# Altium PCB Eval_Board.PcbDoc
Units mm, origin at the board's own origin, x right, y up, seen from the top; angles counter-clockwise.
Board outline 60 x 50 mm, 2 copper layers (Top Layer, Bottom Layer); 35 components, 14 nets, 75 pads, 11 vias.
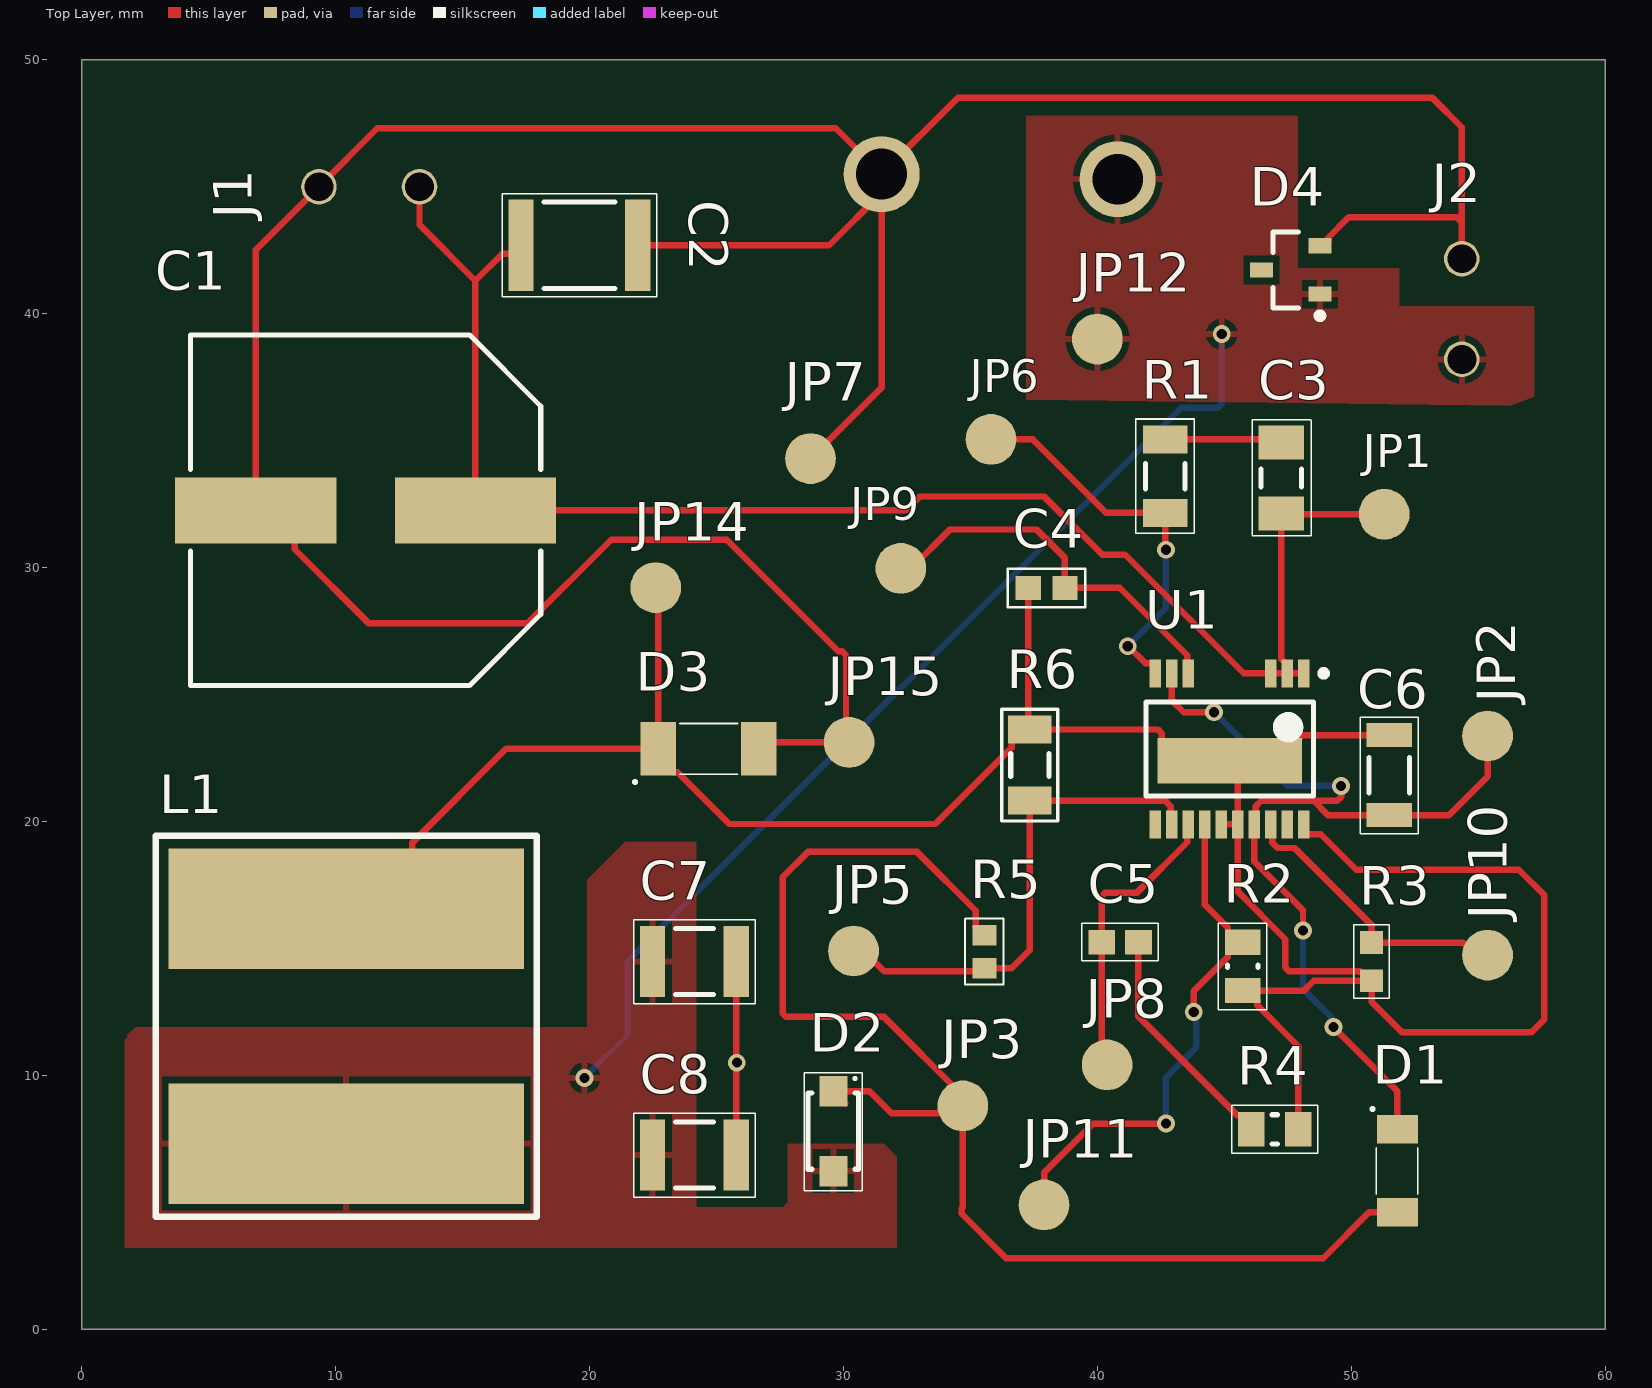
[diagram p0: Top Layer view]
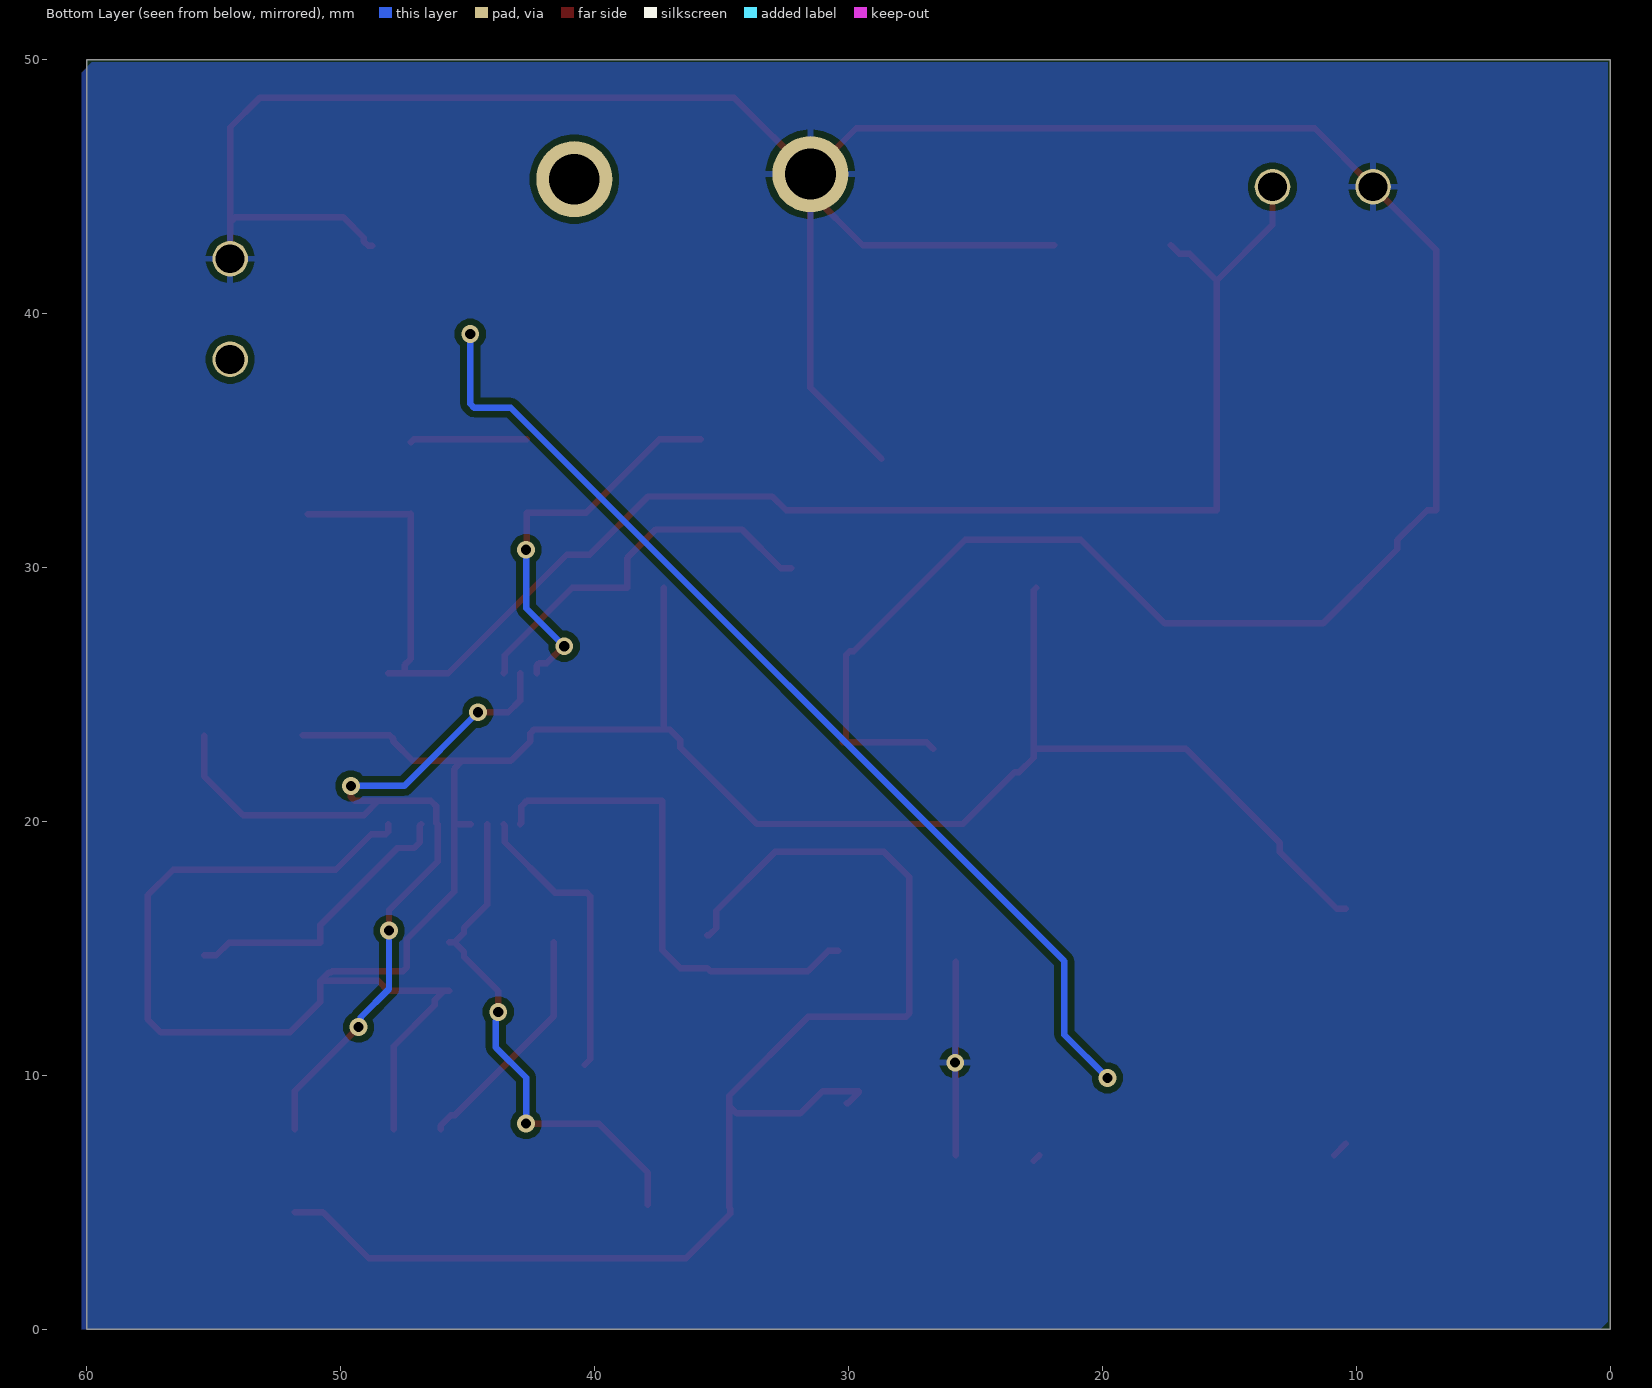
[diagram p1: Bottom Layer view, seen from below]

## Layer stack, top to bottom
Top Solder: solder mask 0.0102, Solder Resist, Dk 3.5
Top Layer: signal copper 0.0356
Dielectric 1: dielectric 0.32, FR-4, Dk 4.8
Bottom Layer: signal copper 0.0356
Bottom Solder: solder mask 0.0102, Solder Resist, Dk 3.5

## Board outline
0,0 60,0 60,50 0,50

## Design rules (kind name [scope] priority, off if disabled: settings)
Clearance [All] p1: gap=0.254 ignorepadtopadclearanceinfootprint=FALSE except(0: Arc-Hole Track-Hole SMDPad-Hole THPad-Hole Via-Hole Fill-Hole Poly-Hole Region-Hole Text-Hole)
PolygonConnect [All] p1: connectstyle=Relief reliefconductorwidth=0.254 reliefentries=4 polygonreliefangle="90 Angle" airgapwidth=0.254
RoutingVias [All] p1: holewidth=0.711 width=1.27 viastyle="Through Hole" minholewidth=0.711 minwidth=1.27 maxholewidth=0.711 maxwidth=1.27
SolderMaskExpansion [All] p1: expansion=0.102 istentingtop=FALSE
Width [All] p1: maxlimit=0.254 minlimit=0.254 preferedwidth=0.254
30 further rules are at their usual default settings.

## Classes and differential pairs
net class U1_Nets: BIAS DCM FB INTV IREG NetU1_11 NetU1_19 PRE-GND SOURCE VC Vin
net class R6_Nets: FB PRE-GND
net class R5_Nets: FB FB2
net class R4_Nets: PRE-GND VC2
net class R3_Nets: PRE-GND SOURCE
net class R2_Nets: IREG PRE-GND
net class R1_Nets: DCM DCM2
net class L1_Nets: PRE-GND Vout
net class JP15_Nets: GND
net class JP14_Nets: PRE-GND
net class JP12_Nets: Vout
net class JP11_Nets: IREG
net class JP10_Nets: SOURCE
net class JP9_Nets: INTV
net class JP8_Nets: VC
net class JP7_Nets: GND
net class JP6_Nets: DCM
net class JP5_Nets: FB
net class JP3_Nets: FB2
net class JP2_Nets: BIAS
net class JP1_Nets: Vin
net class J2_Nets: GND Vout
net class J1_Nets: GND Vin
net class D4_Nets: GND Vout
net class D3_Nets: GND PRE-GND
net class D2_Nets: FB2 Vout
net class D1_Nets: BIAS FB2
net class C8_Nets: GND Vout
net class C7_Nets: GND Vout
net class C6_Nets: BIAS PRE-GND
net class C5_Nets: VC VC2
net class C4_Nets: INTV PRE-GND
net class C3_Nets: DCM2 Vin
net class C2_Nets: GND Vin
net class C1_Nets: GND Vin

## Components (designator, comment, footprint, x,y, rotation, side; value= is the part's Value field where it differs from the comment)
C1 "3.3uF 450V" CAPAE125136X145M 11.176,32.258 r180 top
C2 "0.47uF 450V 1812" CAPC4532X28N 19.6,42.7 r0 top
C3 "10pF" CAPC3216X09N 47.244,33.528 r90 top
C4 "10V" CAPC1608X06N 38,29.2 r0 top
C5 "0.33uF" CAPC1608X09N 40.894,15.24 r180 top
C6 "10uF 25V 1206" CAPC3216X18N 51.5,21.825 r270 top
C7 "22uF 10V" CAPC3225X28N 24.13,14.478 r180 top
C8 "22uF 10V" CAPC3225X28N 24.13,6.858 r180 top
D1 "30V" PMEG3010EGWX 51.816,7.874 r270 top
D2 "CMMR1U-06TRPBFREE" SODFL375X108-2N 29.6,7.8 r270 top
D3 "600V" D3 24.69,22.86 r0 top
D4 "5.1V" SOT95P230X110-3N 47.618,41.722 r180 top
J1 "640384-2" Header 13.3,45 r180 top
J2 "640384-2" Header 54.356,38.204 r90 top
JP1 "Testpoint2" TP2 51.3,32.1 r0 top
JP2 "Testpoint2" TP2 55.372,23.368 r0 top
JP3 "Testpoint2" TP2 34.7,8.8 r180 top
JP5 "Testpoint2" TP2 30.4,14.9 r0 top
JP6 "Testpoint2" TP2 35.814,35.052 r0 top
JP7 "Testpoint2" TP2 28.702,34.29 r90 top
JP8 "Testpoint2" TP2 40.386,10.414 r0 top
JP9 "Testpoint2" TP2 32.258,29.972 r180 top
JP10 "Testpoint2" TP2 55.372,14.732 r90 top
JP11 "Testpoint2" TP2 37.9,4.9 r90 top
JP12 "Testpoint2" TP2 40,39 r90 top
JP14 "Testpoint2" TP2 22.606,29.21 r90 top
JP15 "Testpoint2" TP2 30.226,23.114 r90 top
L1 "270uH 1.2A" PCBComponent_1 10.414,11.938 r0 top
R1 "4.99k" 4.99K 42.672,33.602 r270 top
R2 "43k" RESC2012X05N 45.72,14.29 r90 top
R3 "180m" RESC1608X06N 50.8,14.478 r90 top
R4 "22.1k" RESC2012X06N 46.99,7.874 r180 top
R5 "15.4k" CRCW060315K4FKEB 35.56,14.874 r90 top
R6 "5k" RT1206BRD075KL 37.338,22.222 r270 top
U1 "LT8315EFE#PBF" TSOP65P650X120-20N 45.212,22.86 r270 top

## Footprints (in the part's own frame and the unit in brackets; to place one, negate y for a bottom-side part, rotate by r counter-clockwise, add the part's x,y. Pads: shape width x height; smd on the part's side, far side on the other; paste and mask are expansions set on the pad)
4.99K [mm] "Chip Resistor, 2-Leads, Body 3.15x1.60mm, IPC Medium Density"
  rect 1.1x1.75 smd: 1(-1.45,0) 2(1.45,0)
  silkscreen extent -2.25,-1.15 2.25,1.15, body extent -1.65,-0.87 1.65,0.87, height 0.6
CAPAE125136X145M [mm] "Aluminum Electrolytic Capacitor, Body 13.60x13.60x14.50mm, IPC Low Density"
  rect 6.35x2.6 smd: 1(-4.325,0) 2(4.325,0)
  silkscreen extent -6.9,-6.9 6.9,6.9, body extent -6.9,-6.9 6.9,6.9, height 14.5
CAPC1608X06N [mm] "Chip Capacitor, 2-Leads, Body 1.60x0.80mm, IPC Medium Density"
  rect 1x0.95 smd: 1(-0.725,0) 2(0.725,0)
  silkscreen extent -1.52,-0.76 1.52,0.76, body extent -0.85,-0.45 0.85,0.45, height 0.6
CAPC1608X09N [mm] "0.33uF"
  rect 1.05x0.95 smd: 1(-0.725,0) 2(0.725,0)
  silkscreen extent -1.5,-0.75 1.5,0.72, body extent -0.85,-0.45 0.85,0.45, height 0.87
CAPC3216X09N [mm] "10pF"
  rect 1.35x1.8 smd: 1(-1.4,0) 2(1.4,0)
  silkscreen extent -2.27,-1.17 2.3,1.15, body extent -1.68,-0.87 1.68,0.87, height 0.9
CAPC3216X18N [mm] "Chip Capacitor, 2-Leads, Body 3.20x1.60mm, IPC Medium Density"
  rect 0.95x1.8 smd: 1(-1.575,0) 2(1.575,0)
  silkscreen extent -2.29,-1.14 2.31,1.14, body extent -1.7,-0.9 1.7,0.9, height 1.8
CAPC3225X28N [mm] "Chip Capacitor, 2-Leads, Body 3.20x2.50mm, IPC Medium Density"
  rect 1x2.8 smd: 1(-1.65,0) 2(1.65,0)
  silkscreen extent -2.39,-1.65 2.39,1.65, body extent -1.8,-1.4 1.8,1.4, height 2.8
CAPC4532X28N [mm] "Chip Capacitor, 2-Leads, Body 4.50x3.20mm, IPC Medium Density"
  rect 1x3.6 smd: 1(-2.3,0) 2(2.3,0)
  silkscreen extent -3.05,-2.03 3.05,2.03, body extent -2.45,-1.8 2.45,1.8, height 2.8
CRCW060315K4FKEB [mm] "Chip Resistor, 2-Leads, Body 1.58x0.85mm, IPC Medium Density"
  rect 0.8x0.95 smd: 1(-0.65,0) 2(0.65,0)
  silkscreen extent -1.3,-0.75 1.3,0.77, body extent -0.83,-0.48 0.82,0.48, height 0.5
D3 [mm]
  rect 1.4x2.1 smd: 1(-1.98,0) 2(1.98,0)
  silkscreen extent -2.94,-1.34 1.13,1
Header [mm]
  round 1.4 hole 1.14: 1(0,0) 2(3.96,0)
PCBComponent_1 [mm]
  rect 14x4.75 smd: 1(0,4.625) 2(0,-4.625)
  silkscreen extent -7.5,-7.5 7.5,7.5
PMEG3010EGWX [mm]
  rect 1.11x1.62 smd: 1(0,0) 2(3.27,0)
  silkscreen extent -0.84,-1.01 2.55,0.8
RESC1608X06N [mm] "180m"
  rect 0.9x0.9 smd: 1(-0.75,0) 2(0.75,0)
  silkscreen extent -1.45,-0.7 1.45,0.7, body extent -0.85,-0.45 0.85,0.45, height 0.55
RESC2012X05N [mm] "Chip Resistor, 2-Leads, Body 2.05x1.25mm, IPC Medium Density"
  rect 1x1.4 smd: 1(-0.95,0) 2(0.95,0)
  silkscreen extent -1.7,-0.95 1.7,0.95, body extent -1.1,-0.7 1.1,0.7, height 0.5
RESC2012X06N [mm] "21.1k"
  rect 1.05x1.35 smd: 1(-0.925,0) 2(0.925,0)
  silkscreen extent -1.7,-0.95 1.7,0.95, body extent -1.1,-0.67 1.1,0.67, height 0.65
RT1206BRD075KL [mm] "Chip Resistor, 2-Leads, Body 3.10x1.60mm, IPC Medium Density"
  rect 1.1x1.7 smd: 1(-1.4,0) 2(1.4,0)
  silkscreen extent -2.2,-1.1 2.2,1.1, body extent -1.6,-0.85 1.6,0.85, height 0.65
SODFL375X108-2N [mm] "SODFL, 2-Leads, Body 1.80x3.75mm, IPC Medium Density"
  rect 1.2x1.1 smd: 1(-1.575,0) 2(1.575,0)
  silkscreen extent -2.31,-1.14 2.34,1.14, body extent -1.48,-0.97 1.47,0.97, height 1.08
SOT95P230X110-3N [mm] "SOT23, 3-Leads, Body 2.90x2.30mm, Pitch 0.95mm, IPC Medium Density"
  rect 0.9x0.6 smd: 1(-1.15,0.95) 2(-1.15,-0.95) 3(1.15,0)
  silkscreen extent -1.28,-1.5 0.7,1.92, body extent -0.7,-1.5 0.7,1.5, height 1.1
TP2 [mm]
  round 2 smd: 1(0,0)
TSOP65P650X120-20N [mm] "TSOP, 20-Leads, Body 6.50x4.40mm, Pitch 0.65mm, IPC Medium Density"
  rect 1.1x0.45 smd mask+0.05: 1(-2.975,2.925) 2(-2.975,2.275) 3(-2.975,1.625) 8(-2.975,-1.625) 9(-2.975,-2.275) 10(-2.975,-2.925)
  rect 1.1x0.45 smd paste+0 mask+0.05: 11(2.975,-2.925) 12(2.975,-2.275) 13(2.975,-1.625) 14(2.975,-0.975) 15(2.975,-0.325) 16(2.975,0.325) 17(2.975,0.975) 18(2.975,1.625) 19(2.975,2.275) 20(2.975,2.925)
  rect 1.78x5.68 smd mask+0.05: 21(0.47,0)
  silkscreen extent -3.1,-3.3 1.85,3.83, body extent -2.25,-3.3 2.25,3.3, height 1.2

## Part data
C1: library part UUJ2W3R3MNQ1MS, "Al Cap UJ series SMT 3.3uF 450V", Capacitance=3.3uF, Case/Package=Radial, Leakage Current=100uA, Manufacturer=Nichicon, Max Operating Temperature=105°C, Min Operating Temperature=-40°C, Package Quantity=500, Ripple Current=40mA, Supplier Part Number 1=493-16089-1-ND, Tolerance=20%, Voltage=450V, Category="Aluminum Electrolytic Capacitors", ComponentLink1Description=https://datasheet.ciiva.com/11781/0900766b80fa39e6-11781932.pdf?src-supplier=RSComponents, ComponentLink1URL=https://datasheet.ciiva.com/11781/0900766b80fa39e6-11781932.pdf?src-supplier=RSComponents, ComponentLink2Description=https://datasheet.ciiva.com/11687/e-uj-11687990.pdf?src-supplier=Avnet, ComponentLink2URL=https://datasheet.ciiva.com/11687/e-uj-11687990.pdf?src-supplier=Avnet, Construction=Cylindrical, Diameter=12.5mm, Height=13.5mm, Height - Seated (Max)=0.571inch, Lead Diameter=1.4mm, Lead Pitch=4mm, Length=13.5mm, Life (Hours)=5000Hour, Manufacturer Part Number=UUJ2W3R3MNQ1MS, Mount="Surface Mount", Packaging="Tape and Reel", Polarity=Polar, Pricing 1="1=1.50000, 10=1.18700, 50=1.02860, 100=0.89010 (USD)", Radiation Hardening=No, RoHS=Yes, RoHS Compliant=Yes, Series=UJ, Stock 1=1639, Supplier 1=Digi-Key, Termination=SMD/SMT, Voltage Rating=450V, Voltage Rating (DC)=450V
C2: library part CGA8N4X7T2W474M230KA, "Automotive Grade MLCC, 1812, X7T, 450V, 0.47 F, 20%, 2.30mm", Capacitance=470nF, Case Code (Imperial)=1812, Case Code (Metric)=4532, Manufacturer=TDK, Max Operating Temperature=125°C, Min Operating Temperature=-55°C, Package Quantity=500, Ratings=AEC-Q200, Supplier Part Number 1=445-13132-1-ND, Tolerance=20%, Voltage Rating=450V, Case/Package=1812, Category="Ceramic Capacitors", ComponentLink1Description=https://product.tdk.com/info/en/documents/chara_sheet/CGA8N4X7T2W474M230KA.pdf?src-supplier=Digi-Key, ComponentLink1URL=https://product.tdk.com/info/en/documents/chara_sheet/CGA8N4X7T2W474M230KA.pdf?src-supplier=Digi-Key, ComponentLink2Description=https://product.tdk.com/info/en/catalog/spec/mlccspec_automotive_general_midvoltage_en.pdf?src-supplier=Digi-Key, ComponentLink2URL=https://product.tdk.com/info/en/catalog/spec/mlccspec_automotive_general_midvoltage_en.pdf?src-supplier=Digi-Key, ComponentLink3Description=http://product.tdk.com/en/catalog/datasheets/mlcc_automotive_midvoltage_en.pdf?src-supplier=Avnet, ComponentLink3URL=http://product.tdk.com/en/catalog/datasheets/mlcc_automotive_midvoltage_en.pdf?src-supplier=Avnet, Length=0.177inch, Manufacturer Part Number=CGA8N4X7T2W474M230KA, Mount="Surface Mount", Packaging="Tape and Reel", Pricing 1="1=1.20000, 10=0.94400, 50=0.81800, 100=0.70780 (USD)", RoHS=Yes, Series=CGA, Stock 1=1741, Supplier 1=Digi-Key, Thickness=0.098inch, Width=0.126inch
C3: library part 885012008019, "CAP CER 10PF 25V C0G/NP0 1206", Case Code (Imperial)=1206, Case Code (Metric)=3216, Manufacturer="Wurth Electronics", Max Operating Temperature=125°C, Min Operating Temperature=-55°C, Supplier Part Number 1=732-7872-1-ND, Tolerance=5%, Voltage Rating=25V, Capacitance=10pF, Case/Package=1206, Category="Ceramic Capacitors", ComponentLink1Description=http://www.farnell.com/datasheets/2546682.pdf?src-supplier=Farnell, ComponentLink1URL=http://www.farnell.com/datasheets/2546682.pdf?src-supplier=Farnell, ComponentLink2Description=http://katalog.we-online.de/pbs/datasheet/885012008019.pdf?src-supplier=Digi-Key, ComponentLink2URL=http://katalog.we-online.de/pbs/datasheet/885012008019.pdf?src-supplier=Digi-Key, ComponentLink3Description=https://katalog.we-online.de/pbs/datasheet/885012008019.pdf?src-supplier=Digi-Key, ComponentLink3URL=https://katalog.we-online.de/pbs/datasheet/885012008019.pdf?src-supplier=Digi-Key, Length=0.126inch, Manufacturer Part Number=885012008019, Mount="Surface Mount", Packaging="Tape and Reel", Pricing 1="1=0.11000, 10=0.09700, 100=0.08690, 500=0.07690 (USD)", RoHS=Yes, RoHS Compliant=Yes, Stock 1=6290, Supplier 1=Digi-Key, Thickness=0.035inch, Width=0.063inch
C4: library part EMK107BBJ225MK-T, "CAP CER 2.2UF 16V X5R 0603", Capacitance=2.2uF, Case/Package=0603, Manufacturer="Taiyo Yuden", Max Operating Temperature=85°C, Min Operating Temperature=-55°C, Supplier Part Number 1=587-4866-1-ND, Tolerance=20%, Voltage Rating=16V, Category="Ceramic Capacitors", ComponentLink1Description=http://ds.yuden.co.jp/TYCOMPAS/ut/detail.do?productNo=EMK107BBJ225MK-T&fileName=EMK107BBJ225MK-T_SS&mode=specSheetDownload&src-supplier=Digi-Key, ComponentLink1URL=http://ds.yuden.co.jp/TYCOMPAS/ut/detail.do?productNo=EMK107BBJ225MK-T&fileName=EMK107BBJ225MK-T_SS&mode=specSheetDownload&src-supplier=Digi-Key, Manufacturer Part Number=EMK107BBJ225MK-T, Mount="Surface Mount", Packaging="Cut Tape", Pricing 1="1=0.27000, 10=0.18800, 50=0.12560, 100=0.10670, 500=0.07534, 1000=0.06593 (USD)", RoHS=Yes, RoHS Compliant=Yes, Stock 1=6186, Supplier 1=Digi-Key
C5: library part 885012206023, "CAP CER 0.33UF 10V X7R 0603", Capacitance=330nF, Case Code (Imperial)=0603, Case Code (Metric)=1608, Manufacturer="Wurth Electronics", Max Operating Temperature=125°C, Min Operating Temperature=-55°C, Supplier Part Number 1=732-7942-1-ND, Tolerance=10%, Voltage Rating=10V, Case/Package=0603, Category="Ceramic Capacitors", ComponentLink1Description=http://www.farnell.com/datasheets/2546810.pdf?src-supplier=Farnell, ComponentLink1URL=http://www.farnell.com/datasheets/2546810.pdf?src-supplier=Farnell, ComponentLink2Description=https://katalog.we-online.de/pbs/datasheet/885012206023.pdf?src-supplier=Digi-Key, ComponentLink2URL=https://katalog.we-online.de/pbs/datasheet/885012206023.pdf?src-supplier=Digi-Key, Length=0.063inch, Manufacturer Part Number=885012206023, Mount="Surface Mount", Packaging="Cut Tape", Pricing 1="1=0.10000, 10=0.07800, 100=0.07020, 500=0.06210 (USD)", RoHS=Yes, RoHS Compliant=Yes, Stock 1=791, Supplier 1=Digi-Key, Thickness=0.037inch, Width=0.031inch
C6: library part C3216X5R1E106M085AC, "CAP CER 10UF 25V X5R 1206", Capacitance=10uF, Case Code (Imperial)=1206, Case Code (Metric)=3216, Dielectric=X5R, Dielectric Material=Ceramic, Manufacturer=TDK, Max Operating Temperature=85°C, Min Operating Temperature=-55°C, Package Quantity=4000, Supplier Part Number 1=445-14678-1-ND, Tolerance=20%, Voltage Rating=25V, Case/Package=1206, Category="Ceramic Capacitors", ComponentLink1Description=https://datasheet.ciiva.com/14908/tdkmlcccaprange-14908421.pdf?src-supplier=Digi-Key, ComponentLink1URL=https://datasheet.ciiva.com/14908/tdkmlcccaprange-14908421.pdf?src-supplier=Digi-Key, ComponentLink2Description=https://datasheet.ciiva.com/14908/tdkmlcccaprange-14908422.pdf?src-supplier=Digi-Key, ComponentLink2URL=https://datasheet.ciiva.com/14908/tdkmlcccaprange-14908422.pdf?src-supplier=Digi-Key, Height=0.85mm, Lead Free="Lead Free", Length=0.126inch, Manufacturer Part Number=C3216X5R1E106M085AC, Mount="Surface Mount", Packaging="Tape and Reel", Pricing 1="1=0.57000, 10=0.40100, 50=0.30300, 100=0.26390, 500=0.19550, 1000=0.16618 (USD)", RoHS=Yes, Series=C, Stock 1=61121, Supplier 1=Digi-Key, Termination=SMD/SMT, Thickness=0.039inch, Voltage Rating (DC)=25V, Weight=0.000571oz, Width=0.063inch
C7 C8: library part C3225X5R1A226M230AA, "CAP CER 22UF 10V X5R 1210", Capacitance=22uF, Case Code (Imperial)=1210, Case Code (Metric)=3225, Dielectric=X5R, Dielectric Material=Ceramic, Manufacturer=TDK, Max Operating Temperature=85°C, Min Operating Temperature=-55°C, Package Quantity=1, Supplier Part Number 1=445-1403-1-ND, Tolerance=20%, Voltage=10V, Case/Package=1210, Category="Ceramic Capacitors", ComponentLink1Description=https://datasheet.ciiva.com/11785/0900766b80c1bb00-11785903.pdf?src-supplier=RSComponents, ComponentLink1URL=https://datasheet.ciiva.com/11785/0900766b80c1bb00-11785903.pdf?src-supplier=RSComponents, ComponentLink2Description=https://datasheet.ciiva.com/6252/tdkmlcccaprange-6252831.pdf?src-supplier=Digi-Key, ComponentLink2URL=https://datasheet.ciiva.com/6252/tdkmlcccaprange-6252831.pdf?src-supplier=Digi-Key, ComponentLink3Description=https://datasheet.ciiva.com/6252/tdkmlcccaprange-6252837.pdf?src-supplier=Digi-Key, ComponentLink3URL=https://datasheet.ciiva.com/6252/tdkmlcccaprange-6252837.pdf?src-supplier=Digi-Key, ComponentLink4Description=https://datasheet.ciiva.com/16498/e412-c-16498766.pdf?src-supplier=Future+Electronics, ComponentLink4URL=https://datasheet.ciiva.com/16498/e412-c-16498766.pdf?src-supplier=Future+Electronics, ComponentLink5Description=https://datasheet.ciiva.com/28620/1571323-28620619.pdf?src-supplier=Element14, ComponentLink5URL=https://datasheet.ciiva.com/28620/1571323-28620619.pdf?src-supplier=Element14, ComponentLink6Description=https://datasheet.ciiva.com/22694/639999-22694174.pdf?src-supplier=Element14, ComponentLink6URL=https://datasheet.ciiva.com/22694/639999-22694174.pdf?src-supplier=Element14, Construction=Flat, Depth=2.5mm, Height=2.3mm, Lead Free="Lead Free", Length=3.2mm, Manufacturer Part Number=C3225X5R1A226M230AA, Mount="Surface Mount", Number of Pins=2, Packaging="Tape and Reel", Pricing 1="1=0.59000, 10=0.41500, 50=0.31380, 100=0.27320, 500=0.20240 (USD)", REACH SVHC="No SVHC", Resistor Type=Ceramic, RoHS=Yes, Series=C, Stock 1=29265, Supplier 1=Digi-Key, Termination=SMD/SMT, Thickness=0.098inch, Voltage Rating=10V, Voltage Rating (DC)=10V, Weight=0.000564oz, Width=0.098inch
D1: library part PMEG3010EGWX, Manufacturer=Nexperia, Supplier Part Number 1=1727-7343-1-ND, Category="Schottky Diodes", Manufacturer Part Number=PMEG3010EGWX, Pricing 1="1=0.31000, 10=0.25200, 100=0.13360, 500=0.08786, 1000=0.05975 (USD)", RoHS=Yes, RoHS Compliant=Yes, Stock 1=5980, Supplier 1=Digi-Key
D2: "Diode Switching 600V 1A Automotive 2-Pin SOD-123F T/R. https://my.centralsemi.com/datasheets/CMMR1U_SERIES.PDF", Case/Package=SOD, Forward Voltage=1.7V, Manufacturer="Central Semiconductor", Max Operating Temperature=150°C, Min Operating Temperature=-65°C, Peak Non-Repetitive Surge Current=30A, Supplier Part Number 1=1514-CMMR1U-06TRPBFREECT-ND, Category=Uncategorized, ComponentLink1Description=https://datasheet.ciiva.com/26939/getdatasheetpartid-707878-26939601.pdf?src-supplier=Verical, ComponentLink1URL=https://datasheet.ciiva.com/26939/getdatasheetpartid-707878-26939601.pdf?src-supplier=Verical, Element Configuration=Single, Manufacturer Part Number=CMMR1U-06TRPBFREE, Mount="Surface Mount", Number of Pins=2, Packaging="Tape and Reel", Pricing 1="1=0.82000, 10=0.72600, 100=0.55660, 500=0.44000, 1000=0.35200 (USD)", Radiation Hardening=No, RoHS=Yes, RoHS Compliant=Yes, Stock 1=10653, Supplier 1=Digi-Key
D3: library part HS2JFSM3G, Manufacturer="Taiwan Semiconductor", Supplier Part Number 1=1801-HS2JFSM3GCT-ND, Manufacturer Part Number=HS2JFSM3G, Pricing 1="1=0.45000, 10=0.38700, 100=0.28900, 500=0.22704, 1000=0.17544 (USD)", RoHS=No, Stock 1=3460, Supplier 1=DigiKey
D4: library part BZX84-C5V1,215, "Zener Diode Single 5.1V 5% 60Ohm 250mW Automotive 3-Pin SOT-23 T/R", Manufacturer=Nexperia, Supplier Part Number 1=1727-2939-1-ND, ComponentLink1Description=http://www.farnell.com/datasheets/2242065.pdf?src-supplier=Farnell, ComponentLink1URL=http://www.farnell.com/datasheets/2242065.pdf?src-supplier=Farnell, ComponentLink2Description=https://assets.nexperia.com/documents/data-sheet/BZX84_SER.pdf?src-supplier=Digi-Key, ComponentLink2URL=https://assets.nexperia.com/documents/data-sheet/BZX84_SER.pdf?src-supplier=Digi-Key, Manufacturer Part Number=BZX84-C5V1,215, Pricing 1="1=0.14000, 10=0.12900, 100=0.07000, 500=0.04308, 1000=0.02937 (USD)", RoHS=Yes, RoHS Compliant=Yes, Stock 1=23070, Supplier 1=Digi-Key
J1 J2: "WIRE-BOARD CONNECTOR, HEADER, 2 POSITION, 0.156IN; Product Range:MTA-156 Series; Contact Termination Type:Through Hole; Gender:Header; No. of Contacts:2; Pitch Spacing:3.96mm; Contact Plating:Tin Plated Contacts; No. of Rows:1 ;RoHS Compliant: Yes", Color=Natural, Contact Current Rating=7A, Contact Resistance=3mR, Flammability Rating="UL94 V-0", Housing Color=White, Manufacturer="TE Connectivity", Max Operating Temperature=221°C, Max Voltage Rating (AC)=600V, Min Operating Temperature=-67°C, Number of Power Positions=2, Package Quantity=2000, Supplier Part Number 1=A26168-ND, Approvals=CSA, Backwall/Post Interruptions="No (Without)", Category="Power Connectors", Circuit Application=Power, ComponentLink1Description=https://datasheet.ciiva.com/709/eng-cd-640384-ab-709714.pdf?src-supplier=Digi-Key, ComponentLink1URL=https://datasheet.ciiva.com/709/eng-cd-640384-ab-709714.pdf?src-supplier=Digi-Key, ComponentLink2Description=https://datasheet.ciiva.com/16408/eng-ds-82056-mta-0608-16408667.pdf?src-supplier=Future+Electronics, ComponentLink2URL=https://datasheet.ciiva.com/16408/eng-ds-82056-mta-0608-16408667.pdf?src-supplier=Future+Electronics, ComponentLink3Description=https://datasheet.ciiva.com/30155/8852eng-ds-82056-mta-0608-30155655.pdf?src-supplier=Onlinecomponents.com, ComponentLink3URL=https://datasheet.ciiva.com/30155/8852eng-ds-82056-mta-0608-30155655.pdf?src-supplier=Onlinecomponents.com, Connector System=Wire-to-Board, Connector Type=Pin, Contact Gender=Male, Contact Material="Copper Alloy", Contact Mating Length=0.4inch, Contact Plating=Tin, Contact Post Length=3.18mm, Contact Retention="No (Without)", Contact Type="Male Pin", Current Rating=7A, Depth=6.35mm, ELV=Compliant, Gender=Male, Housing Material=Polyester, Lead Free="Lead Free", Length=0.312inch, Manufacturer Part Number=640384-2, Mating Alignment="No (Without)", Mating Retention="No (Without)", Mount="Through Hole", Number of Contacts=2, Number of Positions=2, Number of Rows=1, Orientation=Straight, Packaging=Bulk, PCB Mount Alignment="No (Without)", PCB Mount Retention=Without, PCB Mounting Orientation=Vertical, PCB Thickness=0.063inch, Pitch=0.156inch, Pricing 1="1=0.40000, 10=0.34400, 100=0.26720, 500=0.22904, 1000=0.19086, 5000=0.16360, 10000=0.15269 (USD)", Radiation Hardening=No, RoHS=Yes, RoHS Compliant=Yes, Sealable="No (Without)", Series=MTA-156, Shrouded="No (Without)", Stock 1=1530, Strain Relief="No (Without)", Supplier 1=Digi-Key, Termination=Solder, Underplate Material=Nickel, Voltage Rating=600V, Voltage Rating (AC)=600V
JP1 JP2 JP3 JP5 JP6 JP7 JP8 JP9 JP10 JP11 JP12 JP14 JP15: "Single layer pad TP"
L1: library part SDR1307-271KL, "FIXED IND 270UH 1.2A 410 MOHM", Case/Package=Nonstandard, Current Rating=1.2A, DC Resistance (DCR)=410mR, Inductance=270uH, Inductance Tolerance=10%, Manufacturer=Bourns, Max Operating Temperature=125°C, Min Operating Temperature=-40°C, Package Quantity=400, Resistor Type=Wirewound, Saturation Current=1.8A, Self Resonant Frequency=3.5MHz, Supplier Part Number 1=SDR1307-271KLCT-ND, Test Frequency=100kHz, Category="Fixed Inductors", ComponentLink1Description=https://datasheet.ciiva.com/1060/sdr1307-1060134.pdf?src-supplier=Digi-Key, ComponentLink1URL=https://datasheet.ciiva.com/1060/sdr1307-1060134.pdf?src-supplier=Digi-Key, ComponentLink2Description=https://datasheet.ciiva.com/1060/sdr1307-1060135.pdf?src-supplier=Digi-Key, ComponentLink2URL=https://datasheet.ciiva.com/1060/sdr1307-1060135.pdf?src-supplier=Digi-Key, ComponentLink3Description=https://datasheet.ciiva.com/8515/sdr1307-8515135.pdf?src-supplier=Avnet, ComponentLink3URL=https://datasheet.ciiva.com/8515/sdr1307-8515135.pdf?src-supplier=Avnet, ComponentLink4Description=https://datasheet.ciiva.com/6708/sdr1307-6708549.pdf?src-supplier=Digi-Key, ComponentLink4URL=https://datasheet.ciiva.com/6708/sdr1307-6708549.pdf?src-supplier=Digi-Key, ComponentLink5Description=https://datasheet.ciiva.com/22715/1723200-22715551.pdf?src-supplier=Element14, ComponentLink5URL=https://datasheet.ciiva.com/22715/1723200-22715551.pdf?src-supplier=Element14, ComponentLink6Description=https://datasheet.ciiva.com/30244/sdr1307-30244511.pdf?src-supplier=Onlinecomponents.com, ComponentLink6URL=https://datasheet.ciiva.com/30244/sdr1307-30244511.pdf?src-supplier=Onlinecomponents.com, Core Material=Ferrite, DC Current=1.2A, Diameter=13mm, Height=0.276inch, Height - Seated (Max)=0.288inch, Length=0.512inch, Manufacturer Part Number=SDR1307-271KL, Max DC Current=1.2A, Military Standard=Not, Mount="Surface Mount", Packaging="Tape and Reel", Pricing 1="1=1.10000, 10=1.02200, 25=0.94400, 50=0.78640, 100=0.73930 (USD)", Q Factor=15, Radiation Hardening=No, REACH SVHC="No SVHC", RMS Current (Irms)=1.2A, RoHS=Yes, Series=SDR1307, Shielding=Unshielded, Stock 1=932, Supplier 1=Digi-Key, Termination=SMD/SMT, Tolerance=10%, Width=0.512inch
R1: library part CRCW12064K99FKEA, "4.99K DCM", Case Code (Imperial)=1206, Case Code (Metric)=3216, Manufacturer=Vishay, Max Operating Temperature=155°C, Max Power Dissipation=250mW, Min Operating Temperature=-55°C, Package Quantity=10, Resistance=4.99kR, Resistance Tolerance=1%, Resistor Type="Thick Film", Supplier Part Number 1=541-4.99KFCT-ND, Temperature Coefficient=100ppm/°C, Voltage Rating=200V, Case/Package=1206, Category="Chip SMD Resistors", ComponentLink1Description=https://datasheet.ciiva.com/2468/dcrcwe3-2468919.pdf?src-supplier=Digi-Key, ComponentLink1URL=https://datasheet.ciiva.com/2468/dcrcwe3-2468919.pdf?src-supplier=Digi-Key, ComponentLink2Description=https://datasheet.ciiva.com/2468/dcrcwe3-2468920.pdf?src-supplier=Digi-Key, ComponentLink2URL=https://datasheet.ciiva.com/2468/dcrcwe3-2468920.pdf?src-supplier=Digi-Key, ComponentLink3Description=https://datasheet.ciiva.com/2468/dcrcwe3-2468921.pdf?src-supplier=Digi-Key, ComponentLink3URL=https://datasheet.ciiva.com/2468/dcrcwe3-2468921.pdf?src-supplier=Digi-Key, ComponentLink4Description=https://datasheet.ciiva.com/5551/dcrcwe3-109170-5551479.pdf?src-supplier=Mouser, ComponentLink4URL=https://datasheet.ciiva.com/5551/dcrcwe3-109170-5551479.pdf?src-supplier=Mouser, ComponentLink5Description=https://datasheet.ciiva.com/9069/dcrcwe3-9069199.pdf?src-supplier=Avnet, ComponentLink5URL=https://datasheet.ciiva.com/9069/dcrcwe3-9069199.pdf?src-supplier=Avnet, ComponentLink6Description=https://datasheet.ciiva.com/16380/dcrcwe3-16380955.pdf?src-supplier=Future+Electronics, ComponentLink6URL=https://datasheet.ciiva.com/16380/dcrcwe3-16380955.pdf?src-supplier=Future+Electronics, ComponentLink7Description=https://datasheet.ciiva.com/16755/70201119-16755772.pdf?src-supplier=Allied+Electronics, ComponentLink7URL=https://datasheet.ciiva.com/16755/70201119-16755772.pdf?src-supplier=Allied+Electronics, ComponentLink8Description=https://datasheet.ciiva.com/16514/dcrcwe3-16514539.pdf?src-supplier=Avnet+Asia, ComponentLink8URL=https://datasheet.ciiva.com/16514/dcrcwe3-16514539.pdf?src-supplier=Avnet+Asia, Construction=Rectangular, Contact Plating=Tin, Depth=1.6mm, Features="Automotive AEC-Q200", Height=0.55mm, Lead Free="Lead Free", Length=3.2mm, Manufacturer Part Number=CRCW12064K99FKEA, Military Standard=Not, Mount="Surface Mount", Number of Terminations=2, Packaging="Tape and Reel", Power Rating=250mW, Pricing 1="1=0.10000, 10=0.08200, 100=0.03160, 1000=0.01392, 2500=0.01202 (USD)", Radiation Hardening=No, REACH SVHC=Unknown, RoHS=Yes, RoHS Compliant=Yes, Series=CRCW, Size Code=1206, Stock 1=47425, Supplier 1=Digi-Key, Technology="THICK FILM", Termination=Solder, Tolerance=1%, Voltage Rating (DC)=200V, Weight=0.000353oz, Width=0.063inch
R2: library part CRCW080543K0JNEA, "Res Thick Film 0805 43K Ohm 5% 0.125W(1/8W) ±200ppm/C Molded SMD Automotive Paper T/R", Case Code (Imperial)=0805, Case Code (Metric)=2012, Manufacturer="Vishay Dale", Max Operating Temperature=155°C, Max Power Dissipation=125mW, Min Operating Temperature=-55°C, Package Quantity=5000, Resistance=43kR, Resistance Tolerance=5%, Resistor Type="Thick Film", Supplier Part Number 1=541-43KACT-ND, Temperature Coefficient=200ppm/°C, Voltage Rating=150V, Case/Package=0805, Category="Chip SMD Resistors", ComponentLink1Description=https://datasheet.ciiva.com/9008/dcrcwe3-9008904.pdf?src-supplier=Avnet, ComponentLink1URL=https://datasheet.ciiva.com/9008/dcrcwe3-9008904.pdf?src-supplier=Avnet, Construction=Rectangular, Contact Plating=Tin, Depth=1.25mm, Features="Automotive AEC-Q200", Height=0.45mm, Lead Free="Lead Free", Length=2mm, Manufacturer Part Number=CRCW080543K0JNEA, Military Standard=Not, Number of Pins=2, Number of Terminations=2, Packaging="Tape and Reel", Power Rating=125mW, Pricing 1="1=0.10000, 10=0.05000, 100=0.02040, 1000=0.00914, 2500=0.00794 (USD)", REACH SVHC=Unknown, RoHS=Yes, RoHS Compliant=Yes, Series=CRCW, Size Code=0805, Stock 1=6239, Supplier 1=Digi-Key, Tolerance=5%, Voltage Rating (DC)=150V, Weight=0.000194oz, Width=1.25mm
R3: library part KDV06FR180ET, Manufacturer=Ohmite, Supplier Part Number 1=273-KDV06FR180ETCT-ND, Category="Chip SMD Resistors", Manufacturer Part Number=KDV06FR180ET, Pricing 1="1=0.26000, 10=0.22000, 25=0.16000, 50=0.11600, 100=0.08600, 250=0.06600, 500=0.05200, 1000=0.03600 (USD)", RoHS=Yes, Stock 1=4902, Supplier 1=Digi-Key
R4: library part RMCF0805FG22K1, "Res Thick Film 0805 22.1K Ohm 1% 1/8W 100ppm/C Molded SMD SMD Paper T/R", Case Code (Imperial)=0805, Case Code (Metric)=2012, Manufacturer="Stackpole Electronics", Max Operating Temperature=155°C, Max Power Dissipation=125mW, Min Operating Temperature=-55°C, Package Quantity=10000, Resistance=22.1kR, Resistor Type="Thick Film", Supplier Part Number 1=RMCF0805FG22K1CT-ND, Temperature Coefficient=100ppm/°C, Tolerance=1%, Case/Package=0805, Category="Chip SMD Resistors", ComponentLink1Description=https://www.seielect.com/catalog/SEI-RMCF_RMCP.pdf?src-supplier=Avnet, ComponentLink1URL=https://www.seielect.com/catalog/SEI-RMCF_RMCP.pdf?src-supplier=Avnet, ComponentLink2Description=http://www.seielect.com/Catalog/SEI-RMCF_RMCP.pdf?src-supplier=Digi-Key, ComponentLink2URL=http://www.seielect.com/Catalog/SEI-RMCF_RMCP.pdf?src-supplier=Digi-Key, ComponentLink3Description=https://www.seielect.com/catalog/SEI-Packaging.pdf?src-supplier=Digi-Key, ComponentLink3URL=https://www.seielect.com/catalog/SEI-Packaging.pdf?src-supplier=Digi-Key, ComponentLink4Description=https://www.seielect.com/Catalog/SEI-RMCF_RMCP.pdf?src-supplier=Digi-Key, ComponentLink4URL=https://www.seielect.com/Catalog/SEI-RMCF_RMCP.pdf?src-supplier=Digi-Key, Contact Plating=Tin,Matte, Features="Automotive AEC-Q200", Height=0.026inch, Lead Free="Lead Free", Length=0.079inch, Manufacturer Part Number=RMCF0805FG22K1, Mount="Surface Mount", Number of Terminations=2, Packaging="Tape and Reel", Pricing 1="1=0.10000, 10=0.02700, 100=0.01090, 1000=0.00488, 2500=0.00423, 5000=0.00350 (USD)", Radiation Hardening=No, RoHS=Yes, RoHS Compliant=Yes, Series=RMCF, Stock 1=16110, Supplier 1=Digi-Key, Width=0.049inch
R5: library part CRCW060315K4FKEB, "Thick Film Resistors 1/10watt 15.4Kohms 1%", Case Code (Imperial)=0603, Case Code (Metric)=1608, Manufacturer="Vishay Dale", Max Operating Temperature=155°C, Max Power Dissipation=100mW, Min Operating Temperature=-55°C, Package Quantity=10000, Resistance=15.4kR, Resistor Type="Thick Film", Supplier Part Number 1=541-CRCW060315K4FKEBDKR-ND, Temperature Coefficient=100ppm/°C, Tolerance=1%, Voltage Rating=75V, Case/Package=0603, Category="Chip SMD Resistors", ComponentLink1Description=https://datasheet.ciiva.com/5544/dcrcwe3-109170-5544853.pdf?src-supplier=Mouser, ComponentLink1URL=https://datasheet.ciiva.com/5544/dcrcwe3-109170-5544853.pdf?src-supplier=Mouser, Features="Automotive AEC-Q200", Height=0.02inch, Lead Free="Lead Free", Length=0.061inch, Manufacturer Part Number=CRCW060315K4FKEB, Number of Terminations=2, Packaging="Tape and Reel", Power Rating=100mW, Pricing 1="1=0.10000, 10=0.03800, 100=0.01560, 1000=0.00701, 2500=0.00608, 5000=0.00503 (USD)", RoHS=Yes, RoHS Compliant=Yes, Series=CRCW, Supplier 1=Digi-Key, Termination=SMD/SMT, Weight=7.1E-05oz, Width=0.033inch
R6: library part RT1206BRD075KL, "Res Thin Film 1206 5K Ohm 0.1% 0.25W(1/4W) ±25ppm/°C Pad SMD T/R", Case Code (Imperial)=1206, Case Code (Metric)=3216, Manufacturer=Yageo, Max Operating Temperature=155°C, Max Power Dissipation=250mW, Min Operating Temperature=-55°C, Resistance=5kR, Resistor Type="Thin Film", Supplier Part Number 1=YAG5090CT-ND, Temperature Coefficient=25ppm/°C, Tolerance=0.1%, Voltage Rating=200V, Case/Package=1206, Category="Chip SMD Resistors", ComponentLink1Description=https://datasheet.ciiva.com/12705/pyu-rt-1-to-0-05-rohs-l-4-12705208.pdf?src-supplier=Mouser, ComponentLink1URL=https://datasheet.ciiva.com/12705/pyu-rt-1-to-0-05-rohs-l-4-12705208.pdf?src-supplier=Mouser, Features="Moisture Resistant", Height=0.026inch, Length=0.122inch, Manufacturer Part Number=RT1206BRD075KL, Number of Terminations=2, Packaging="Tape and Reel", Power Rating=250mW, Pricing 1="1=0.65000, 10=0.50000, 100=0.21000, 1000=0.11585, 2500=0.10861 (USD)", RoHS=Yes, RoHS Compliant=Yes, Series=RT, Stock 1=26847, Supplier 1=Digi-Key, Termination=SMD/SMT, Width=0.063inch
U1: "IC REG CTRLR FLYBACK 20TSSOP", Manufacturer="Analog Devices / Linear Technology", Supplier Part Number 1=LT8315EFE#PBF-ND, Category="Voltage Regulators - Switching", ComponentLink1Description=http://www.linear.com/docs/56703?src-supplier=Digi-Key, ComponentLink1URL=http://www.linear.com/docs/56703?src-supplier=Digi-Key, Manufacturer Part Number=LT8315EFE#PBF, Pricing 1="1=9.84000, 10=8.88800, 25=8.47480, 100=7.35850, 250=7.02780, 500=6.43500 (USD)", RoHS=Yes, RoHS Compliant=Yes, Stock 1=22, Supplier 1=Digi-Key

## Free pads (board coordinates)
  round 3 hole 2: 1(31.5,45.5) 1(40.8,45.3)

## Via types
v1: diameter 0.7, hole 0.4, Top Layer to Bottom Layer, 11 vias

## Nets (pads, with @x,y where several pads share a name; then routed paths per layer and width w, separated by ;. In a path a pad name is that pad's centre, name@x,y a point inside that pad or via, vN(x,y) a via of type N, cw(c..) or ccw(c..) an arc to the next point about the centre after c; other vN are vias at no path point)
BIAS: C6.2 D1.1 JP2.1 U1.9 U1.17 | length 37.5
  Top Layer w0.254: U1.9 42.937,24.763 43.4,24.3 v1(44.6,24.3) ; v1(48.1,15.7) 48.1,16.5 46.187,18.413 U1.17 46.231,19.929 46.231,20.593 46.454,20.816 48.52,20.816 ; v1(49.3,11.9) 51.816,9.384 D1.1 ; v1(49.6,21.4) 49.6,20.965 49.451,20.816 48.52,20.816 ; JP2.1 55.372,21.772 53.85,20.25 C6.2 49.086,20.25 48.52,20.816
  Bottom Layer w0.254: v1(44.6,24.3) 47.5,21.4 v1(49.6,21.4) ; v1(48.1,15.7) 48.1,13.4 49.215,12.285 49.215,11.985 v1(49.3,11.9)
DCM: JP6.1 R1.2 U1.10 | length 15.7
  Top Layer w0.254: JP6.1 37.448,35.052 40.348,32.152 R1.2 42.672,30.728 v1(42.7,30.7) ; v1(41.2,26.9) 41.222,26.9 41.884,26.238 42.189,26.238 42.287,26.14 U1.10
  Bottom Layer w0.254: v1(41.2,26.9) 42.7,28.4 v1(42.7,30.7)
DCM2: C3.2 R1.1 | length 4.6
  Top Layer w0.254: R1.1 47.12,35.052 C3.2
FB: JP5.1 R5.1 R6.2 U1.12 | length 19.9
  Top Layer w0.254: JP5.1 30.8,14.9 31.6,14.1 35.436,14.1 R5.1 36.624,14.224 37.338,14.938 R6.2 42.664,20.822 42.893,20.593 42.893,19.929 U1.12
FB2: D1.2 D2.1 JP3.1 R5.2 | length 53.5
  Top Layer w0.254: D2.1@30.073,8.902 30.023,8.902 29.6,9.325 D2.1 31.025,9.375 31.9,8.5 34.4,8.5 JP3.1 ; R5.2 35.485,15.524 35.212,15.797 35.212,16.488 32.9,18.8 28.6,18.8 27.6,17.8 27.6,12.449 27.749,12.3 31.6,12.3 34.7,9.2 JP3.1 ; D1.2 50.704,4.604 48.9,2.8 36.4,2.8 34.655,4.545 34.655,4.755 34.7,4.8 JP3.1
GND: C1.2 C2.2 C7.1 C8.1 D3.2 D4.2 J1.2 J2.2 JP7.1 JP15.1 pad.1@31.5,45.5 | length 139.7
  Top Layer w0.254: C2.2 29.443,42.7 pad.1@31.5,44.757 ; C8.1 25.78,10.48 v1(25.8,10.5) 25.78,10.52 C7.1 ; D3.2 26.924,23.114 30.1,23.114 JP15.1 30.1,23.24 30.1,26.551 29.951,26.7 29.8,26.7 25.4,31.1 20.849,31.1 17.549,27.8 11.309,27.8 8.383,30.726 8.383,31.085 7.21,32.258 C1.2 6.851,42.511 J1.2 11.64,47.3 29.7,47.3 pad.1@31.5,45.5 ; JP7.1 31.5,37.088 pad.1@31.5,44.757 ; D4.2 48.918,42.672 49.091,42.845 49.091,42.995 49.896,43.8 54.151,43.8 54.3,43.651 ; J2.2 54.356,47.344 53.2,48.5 34.5,48.5 pad.1@31.5,45.5 ; pad.1@31.5,44.757 pad.1@31.5,45.5
INTV: C4.2 JP9.1 U1.8 | length 15.4
  Top Layer w0.254: JP9.1 32.672,29.972 34.2,31.5 37.6,31.5 38.725,30.375 C4.2 40.886,29.2 43.543,26.543 43.543,25.879 U1.8
IREG: JP11.1 R2.2 U1.14 | length 20.6
  Top Layer w0.254: JP11.1 37.9,6.16 39.84,8.1 v1(42.7,8.1) ; v1(43.8,12.5) 43.8,13.32 45.147,14.667 45.147,14.867 R2.2@45.52,15.24 ; U1.14 44.237,16.723 45.147,15.813 45.147,15.613 R2.2@45.52,15.24 ; R2.2 R2.2@45.52,15.24
  Bottom Layer w0.254: v1(42.7,8.1) 42.7,9.9 43.9,11.1 43.9,12.128 43.885,12.143 43.885,12.415 v1(43.8,12.5)
PRE-GND: C4.1 C6.1 D3.1 JP14.1 L1.1 R2.1 R3.1 R4.1 R6.1 U1.15 U1.16 U1.20 U1.21 | length 109.1
  Top Layer w0.254: L1.1 10.773,16.563 13.021,18.811 13.021,19.17 16.711,22.86 D3.1 ; JP14.1 22.71,29.106 D3.1 ; C4.1 37.275,23.685 R6.1 ; U1.15 U1.16 ; R2.1 R2.1@45.92,13.34 ; R4.1 47.915,11.145 46.293,12.767 46.293,12.967 R2.1@45.92,13.34 ; U1.20 48.137,19.598 48.235,19.5 48.8,19.5 50.2,18.1 56.6,18.1 57.6,17.1 57.6,12.2 57.1,11.7 52,11.7 50.8,12.9 R3.1 ; C6.1 48.074,23.4 47.925,23.251 47.925,23.153 47.162,22.39 U1.21 ; D3.1 22.71,22.51 23.283,21.937 23.463,21.937 25.5,19.9 33.616,19.9 36.623,22.907 36.623,23.199 37.046,23.622 R6.1 ; R6.1 42.386,23.622 42.534,23.473 42.534,23.153 43.297,22.39 U1.21 ; U1.21 45.537,22.065 U1.16 ; U1.16 45.537,17.229 47.4,15.366 47.4,14.249 47.549,14.1 50.328,14.1 50.377,14.051 50.477,14.051 R3.1 ; R2.1@45.92,13.34 48.14,13.34 48.528,13.728 R3.1
SOURCE: JP10.1 R3.2 U1.18 | length 11.5
  Top Layer w0.254: U1.18 46.881,19.841 46.881,19.177 47.104,18.954 47.768,18.954 50.8,15.922 R3.2 54.404,15.228 54.9,14.732 JP10.1
VC: C5.2 JP8.1 U1.13 | length 11.7
  Top Layer w0.254: JP8.1 40.169,10.631 C5.2 40.169,17.051 40.318,17.2 41.566,17.2 43.543,19.177 43.543,19.841 U1.13
VC2: C5.1 R4.2 | length 9.3
  Top Layer w0.254: C5.1 41.619,12.32 45.517,8.422 45.667,8.422 46.065,8.024 R4.2
Vin: C1.1 C2.1 C3.1 J1.1 JP1.1 U1.1 U1.2 U1.3 | length 62.2
  Top Layer w0.254: J1.1 13.3,43.5 15.501,41.299 ; C2.1 16.966,42.366 16.568,42.366 15.501,41.299 ; U1.1 U1.2 ; JP1.1 47.272,32.1 C3.1 47.244,26.403 47.487,26.16 U1.2 ; 15.501,41.299 C1.1 32.458,32.258 33,32.8 37.9,32.8 40.2,30.5 41.1,30.5 45.765,25.835 U1.3 U1.2
Vout: C7.2 C8.2 D2.2 D4.1 J2.1 JP12.1 L1.2 pad.1@40.8,45.3 | length 41.5
  Top Layer w0.254: L1.2 L1.2@10.869,6.858 ; C8.2 C8.2@22.7,6.638
  Bottom Layer w0.254: v1(19.8,9.9) 21.5,11.6 21.5,14.5 43.3,36.3 44.751,36.3 44.9,36.449 v1(44.9,39.2)
pads on no net: D4.3 U1.11 U1.19

## Polygon pours and split planes (outlines as drawn)
no net on Layer0 "Default Coverlay 1 Top" (split plane): 0,0 60,0 60,50 0,50
no net on Layer0 "Default Coverlay 1 Bottom" (split plane): 0,0 60,0 60,50 0,50
Vout on Top Layer "VOUT_L01_P000" (solid, pour order 0): 51.9,40.3 57.2,40.3 57.2,36.726 56.263,36.373 37.2,36.614 37.2,47.8 47.9,47.8 47.9,43.9 47.9,41.8 51.9,41.8
Vout on Top Layer "VOUT_L01_P002" (solid, pour order 2): 27.6,4.8 27.8,5 27.8,7.3 31.6,7.3 32.1,6.8 32.1,3.2 24.2,3.2 24.2,4.8
Vout on Top Layer "VOUT_L01_P001" (solid, pour order 1): 1.8,11.5 1.7,11.4 1.7,3.2 24.2,3.2 24.2,19.2 21.4,19.2 19.9,17.7 19.9,11.9 2.1,11.9 1.7,11.5
GND on Bottom Layer "GND_L02_P004" (solid, pour order 4): 0.1,50 0.1,0.3 0.4,0 60.2,0 60.2,49.5 59.8,49.9 0,49.9